# Altium PCB PCB1.PcbDoc
Units mm, origin at the board's own origin, x right, y up, seen from the top; angles counter-clockwise.
Board outline 40.13 x 30.35 mm, 2 copper layers (Top Layer, Bottom Layer); 82 components, 52 nets, 216 pads, 66 vias.
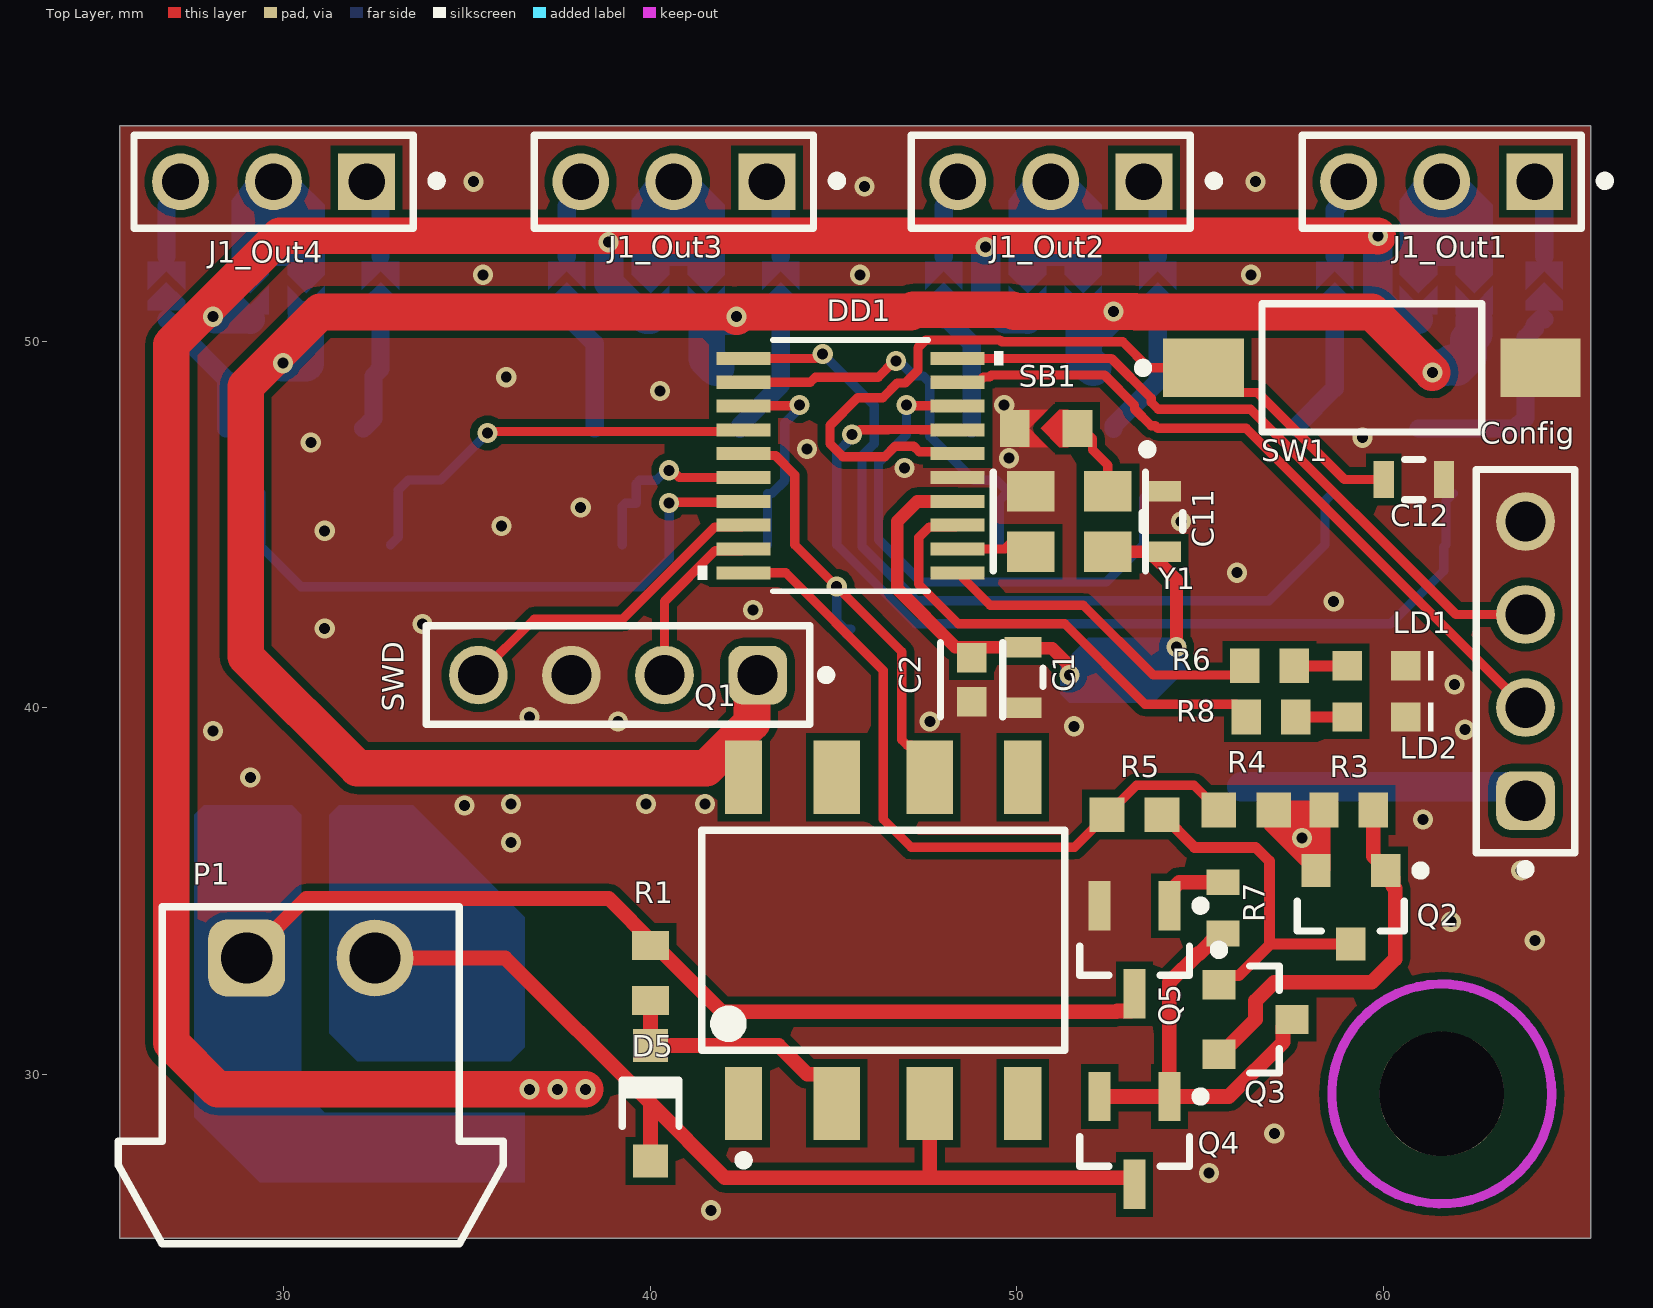
[diagram p0: Top Layer view]
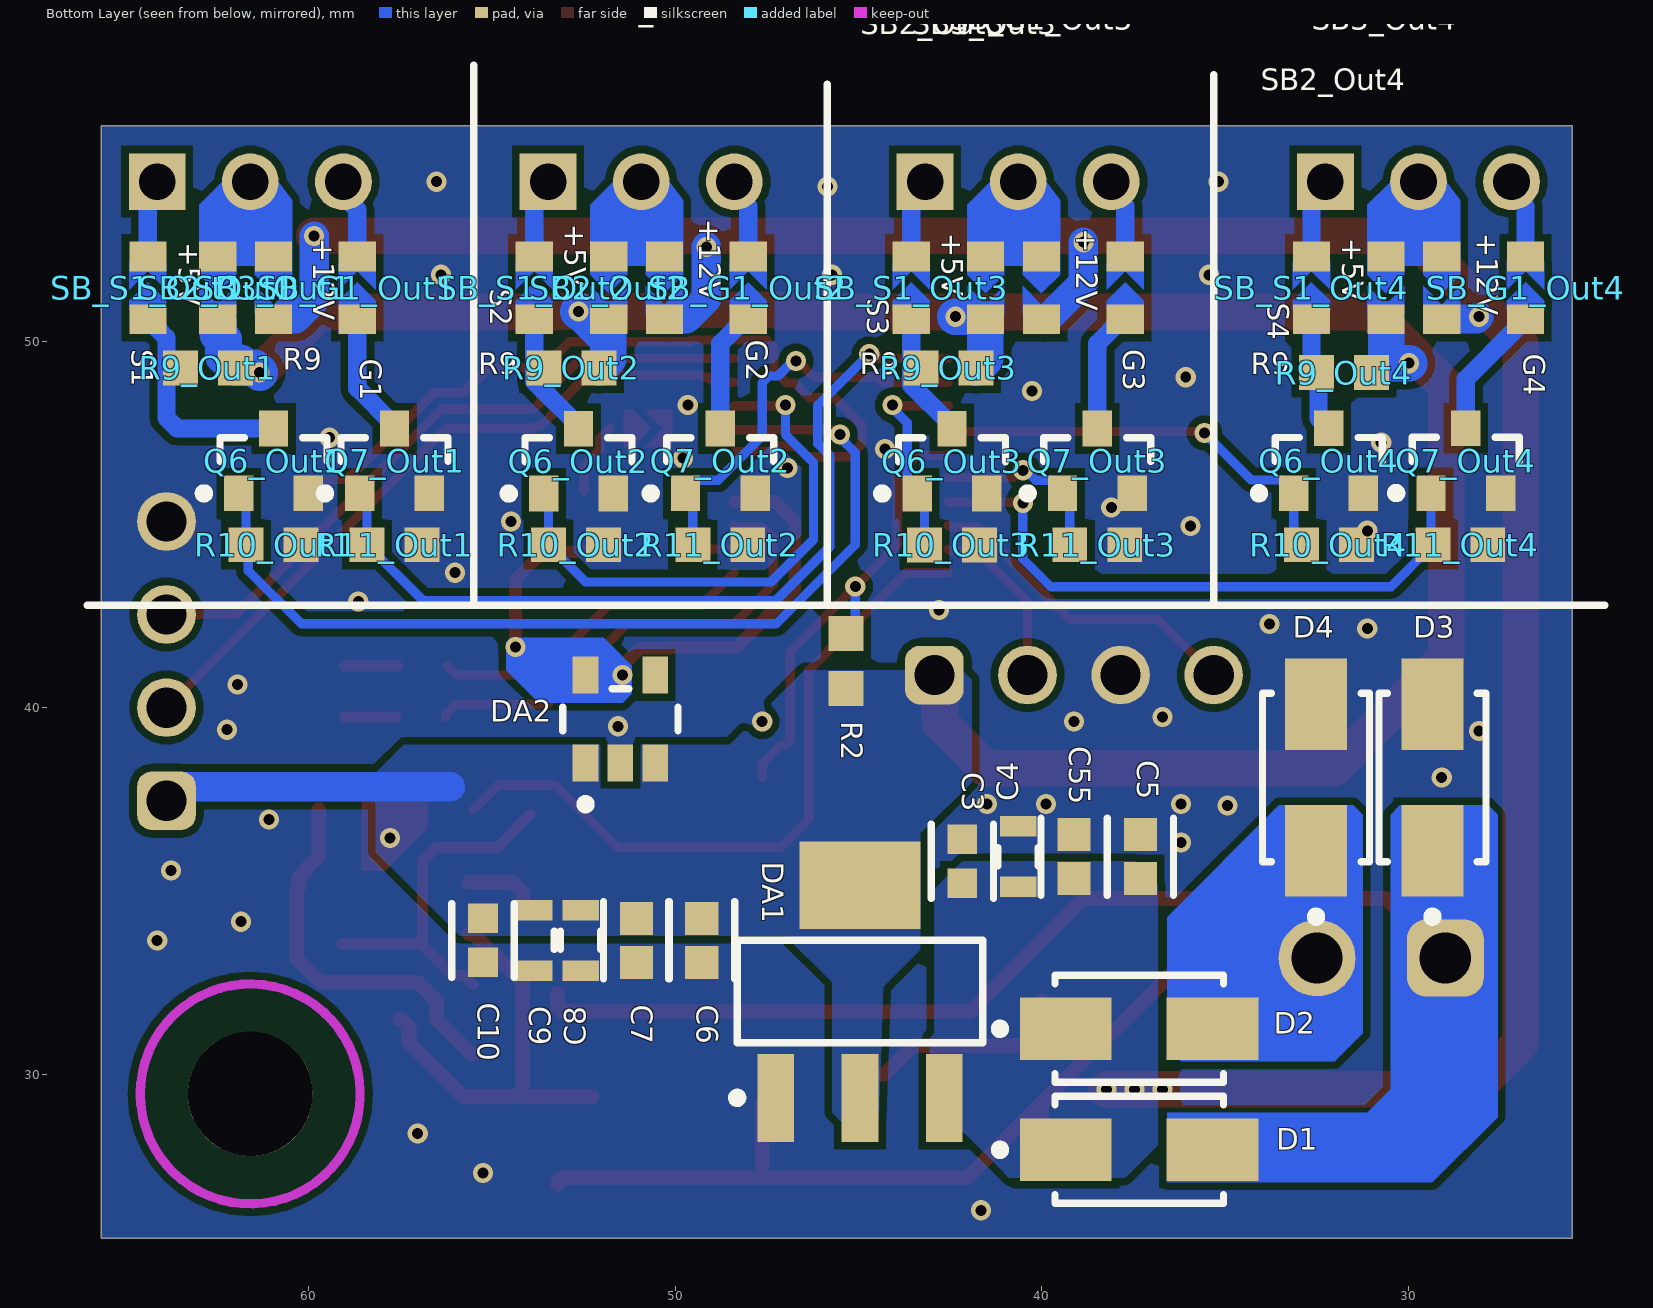
[diagram p1: Bottom Layer view, seen from below]
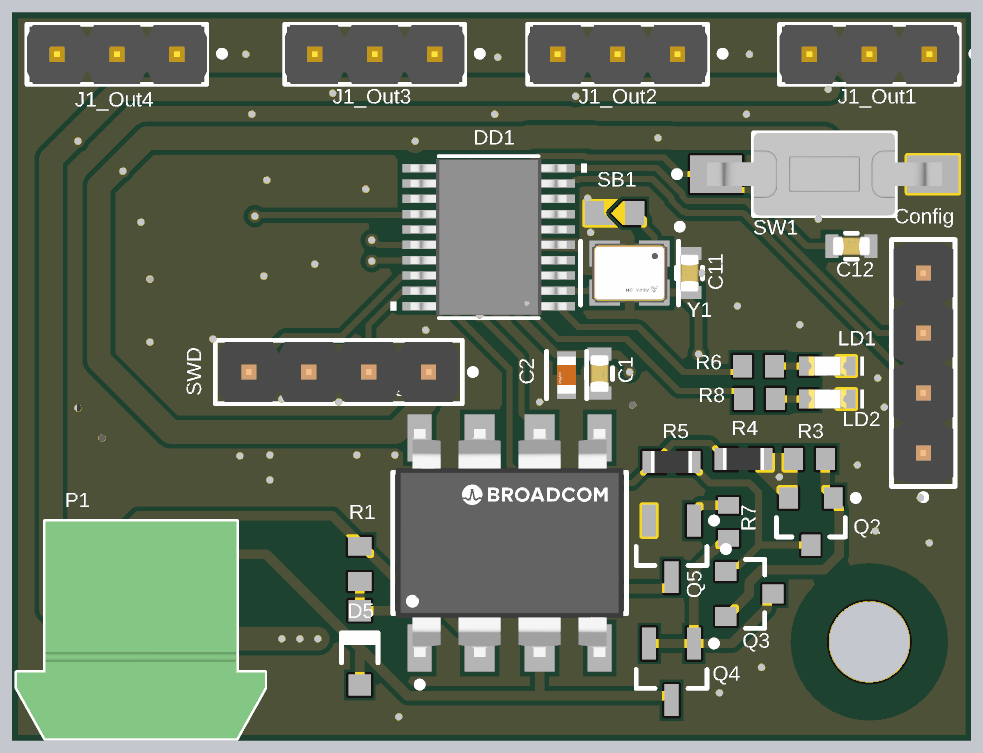
[diagram p2: 3D render of the assembled board from above, using the file's embedded part models]
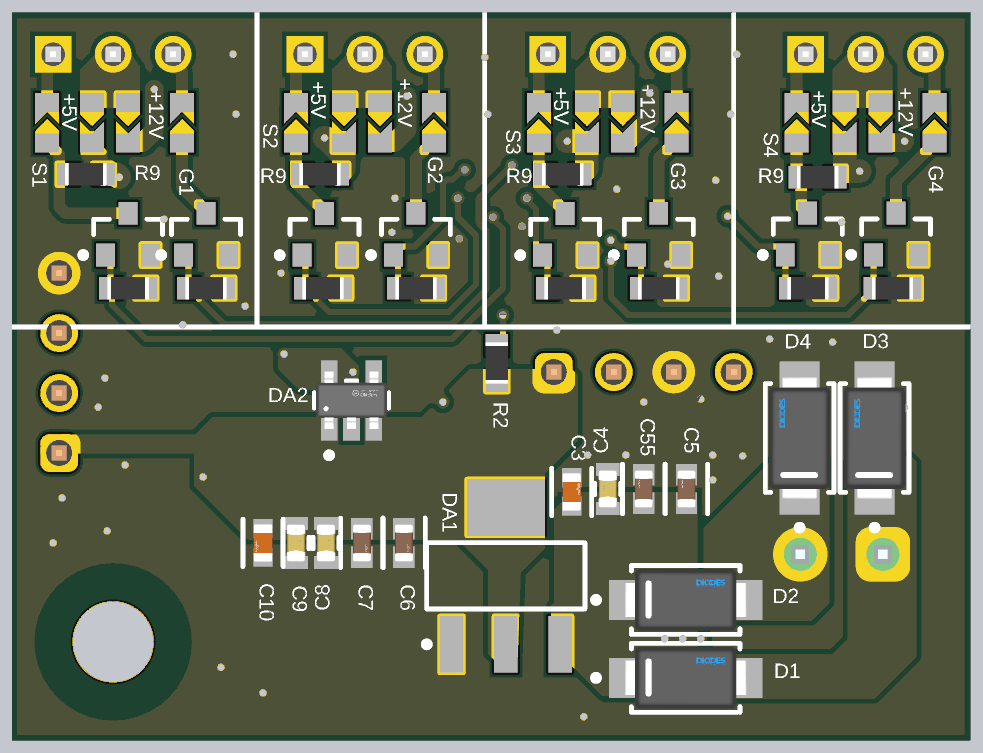
[diagram p3: 3D render of the assembled board from below, using the file's embedded part models]

## Layer stack, top to bottom
Top Solder: solder mask 0.0102, Solder Resist, Dk 3.5
Top Layer: signal copper 0.0356
Dielectric 1: dielectric 0.32, FR-4, Dk 4.8
Bottom Layer: signal copper 0.0356
Bottom Solder: solder mask 0.0102, Solder Resist, Dk 3.5

## Board outline
25.527,25.527 65.659,25.527 65.659,55.88 25.527,55.88

## Design rules (kind name [scope] priority, off if disabled: settings)
Clearance [All] p1: gap=0.2 ignorepadtopadclearanceinfootprint=FALSE
PolygonConnect [All] p1: connectstyle=Direct reliefconductorwidth=0.254 reliefentries=4 polygonreliefangle="90 Angle" airgapwidth=0.254
RoutingVias [All] p1: holewidth=0.3 width=0.7 viastyle="Through Hole" minholewidth=0.3 minwidth=0.5 maxholewidth=3 maxwidth=5
SolderMaskExpansion [All] p1: expansion=0.102 istentingtop=FALSE
SupplyNets "Schematic Supply Nets_3" [InNet('+12V')] p1: voltage=0.000
SupplyNets "Schematic Supply Nets_2" [InNet('+5V')] p2: voltage=0.000
SupplyNets "Schematic Supply Nets_1" [InNet('GND')] p3: voltage=0.000
SupplyNets "Schematic Supply Nets" [InNet('+3V3')] p4: voltage=0.000
Width [All] p1: maxlimit=1 minlimit=0.254 preferedwidth=0.3
30 further rules are at their usual default settings.

## Classes and differential pairs
channel class out: Out1 Out2 Out3 Out4
component class Out4: J1_Out4 Q6_Out4 Q7_Out4 R9_Out4 R10_Out4 R11_Out4 SB2_Out4 SB3_Out4 SB_G1_Out4 SB_S1_Out4
component class Out3: J1_Out3 Q6_Out3 Q7_Out3 R9_Out3 R10_Out3 R11_Out3 SB2_Out3 SB3_Out3 SB_G1_Out3 SB_S1_Out3
component class Out2: J1_Out2 Q6_Out2 Q7_Out2 R9_Out2 R10_Out2 R11_Out2 SB2_Out2 SB3_Out2 SB_G1_Out2 SB_S1_Out2
component class Out1: J1_Out1 Q6_Out1 Q7_Out1 R9_Out1 R10_Out1 R11_Out1 SB2_Out1 SB3_Out1 SB_G1_Out1 SB_S1_Out1
component class top: C1 C2 C3 C4 C5 C6 C7 C8 C9 C10 C11 C12 C55 Config D1 D2 D3 D4 D5 DA1 DA2 DD1 LD1 LD2 P1 Q1 Q2 Q3 Q4 Q5 R1 R2 R3 R4 R5 R6 R7 R8 SB1 SW1 SWD Y1

## Components (designator, comment, footprint, x,y, rotation, side; value= is the part's Value field where it differs from the comment)
C1 "CGA3E2X7R1H104K080AA" FP-CGA3E-0_3-0_1-IPC_C 50.165,40.83 r270 top
C2 "GRM188R60J106ME47D" FP-GRM188-0_1-e0_2_0_55-IPC_C 48.768,40.767 r270 top
C3 "GRM188R60J106ME47D" FP-GRM188-0_1-e0_2_0_55-IPC_C 42.164,35.814 r90 bottom
C4 "CGA3E2X7R1H104K080AA" FP-CGA3E-0_3-0_1-IPC_C 40.64,35.941 r90 bottom
C5 "GRM188R61A226ME15D" FP-GRM188-0_2-IPC_C 37.304,35.942 r90 bottom
C6 "GRM188R61A226ME15D" FP-GRM188-0_2-IPC_C 49.276,33.655 r270 bottom
C7 "GRM188R61A226ME15D" FP-GRM188-0_2-IPC_C 51.054,33.655 r270 bottom
C8 "CGA3E2X7R1H104K080AA" FP-CGA3E-0_3-0_1-IPC_C 52.578,33.655 r270 bottom
C9 "CGA3E2X7R1H104K080AA" FP-CGA3E-0_3-0_1-IPC_C 53.848,33.655 r270 bottom
C10 "GRM188R60J106ME47D" FP-GRM188-0_1-e0_2_0_55-IPC_C 55.245,33.655 r270 bottom
C11 "CGA3E2X7R1H104K080AA" FP-CGA3E-0_3-0_1-IPC_C 53.975,45.085 r90 top
C12 "CGA3E2X7R1H104K080AA" FP-CGA3E-0_3-0_1-IPC_C 60.833,46.228 r0 top
C55 "GRM188R61A226ME15D" FP-GRM188-0_2-IPC_C 39.116,35.941 r90 bottom
Config "61300411121" 61300411121 63.881,41.275 r90 top
D1 "B340A-13-F" FP-SMA-MFG 37.338,27.94 r180 bottom
D2 "B340A-13-F" FP-SMA-MFG 37.338,31.242 r180 bottom
D3 "B340A-13-F" FP-SMA-MFG 29.337,38.1 r90 bottom
D4 "B340A-13-F" FP-SMA-MFG 32.512,38.1 r90 bottom
D5 "1N4148W-7-F" DIOD-SOD123-2_V 40.005,29.21 r90 top
DA1 "LD1117S50CTR" SOT-223_N 44.958,32.258 r90 bottom
DA2 "NCP114ASN330T1G" FP-483-MFG 51.496,39.694 r90 bottom
DD1 "STM32G031F6Px" TSSOP20 45.466,46.609 r180 top value=Value
J1_Out1 "90120-0763" FP-90120-0763-MFG 61.595,54.356 r180 top (schematic designator J1)
J1_Out2 "90120-0763" FP-90120-0763-MFG 50.927,54.356 r180 top (schematic designator J1)
J1_Out3 "90120-0763" FP-90120-0763-MFG 40.64,54.356 r180 top (schematic designator J1)
J1_Out4 "90120-0763" FP-90120-0763-MFG 29.718,54.356 r180 top (schematic designator J1)
LD1 "150060VS75000" WL-SMCW_0603_150060xx75000 59.817,41.148 r180 top
LD2 "150060VS75000" WL-SMCW_0603_150060xx75000 59.817,39.751 r180 top
P1 "15EDGRC-3.5-02" 691305140002 30.734,29.972 r0 top
Q1 "6N137-300E" FP-6N137-300E-MFG 46.355,33.655 r0 top
Q2 "BC857CLT1G" ONSC-SOT-23-3-318-08_V 59.116,34.56 r270 top
Q3 "BC857CLT1G" ONSC-SOT-23-3-318-08_V 56.515,31.496 r0 top
Q4 "BC847B" INF-SOT23_M 53.213,28.194 r270 top
Q5 "BC847B" INF-SOT23_M 53.213,33.401 r270 top
Q6_Out1 "IRLML0030TRPBF" INTR-SOT-23-3_V 60.96,46.736 r180 bottom (schematic designator Q6)
Q6_Out2 "IRLML0030TRPBF" INTR-SOT-23-3_V 52.639,46.732 r180 bottom (schematic designator Q6)
Q6_Out3 "IRLML0030TRPBF" INTR-SOT-23-3_V 42.447,46.732 r180 bottom (schematic designator Q6)
Q6_Out4 "IRLML0030TRPBF" INTR-SOT-23-3_V 32.17,46.742 r180 bottom (schematic designator Q6)
Q7_Out1 "IRLML0030TRPBF" INTR-SOT-23-3_V 57.658,46.736 r180 bottom (schematic designator Q7)
Q7_Out2 "IRLML0030TRPBF" INTR-SOT-23-3_V 48.768,46.736 r180 bottom (schematic designator Q7)
Q7_Out3 "IRLML0030TRPBF" INTR-SOT-23-3_V 38.481,46.736 r180 bottom (schematic designator Q7)
Q7_Out4 "IRLML0030TRPBF" INTR-SOT-23-3_V 28.426,46.746 r180 bottom (schematic designator Q7)
R1 "RC0603FR-071K5L" RESC1608X55X25ML10T15 40.005,32.766 r270 top value=1k5
R2 "ERJ3EKF1002V" RESC1609X55X30NL15T15 45.339,41.275 r90 bottom value=10k
R3 "ERJ-3EKF1502V" RESC1608X55X30NL15T15 59.055,37.211 r180 top value=15
R4 "ERJ3EKF1002V" RESC1609X55X30NL15T15 56.261,37.211 r180 top value=10k
R5 "ERJ3EKF1002V" RESC1609X55X30NL15T15 53.213,37.084 r0 top value=10k
R6 "ERJ-3EKF1003V" RESC1608X55X30NL15T15 56.896,41.148 r0 top value=100
R7 "RC0603FR-076K8L" RESC1608X55X25NL10T15 55.626,34.544 r90 top value=6k8
R8 "ERJ-3EKF1003V" RESC1608X55X30NL15T15 56.936,39.751 r0 top value=100
R9_Out1 "ERJ3EKF1002V" RESC1609X55X30NL15T15 62.75,49.276 r0 bottom value=10k (schematic designator R9)
R9_Out2 "ERJ3EKF1002V" RESC1609X55X30NL15T15 52.832,49.276 r0 bottom value=10k (schematic designator R9)
R9_Out3 "ERJ3EKF1002V" RESC1609X55X30NL15T15 42.545,49.276 r0 bottom value=10k (schematic designator R9)
R9_Out4 "ERJ3EKF1002V" RESC1609X55X30NL15T15 31.75,49.149 r0 bottom value=10k (schematic designator R9)
R10_Out1 "ERJ3EKF1002V" RESC1609X55X30NL15T15 60.96,44.45 r180 bottom value=10k (schematic designator R10)
R10_Out2 "ERJ3EKF1002V" RESC1609X55X30NL15T15 52.705,44.45 r180 bottom value=10k (schematic designator R10)
R10_Out3 "ERJ3EKF1002V" RESC1609X55X30NL15T15 42.447,44.446 r180 bottom value=10k (schematic designator R10)
R10_Out4 "ERJ3EKF1002V" RESC1609X55X30NL15T15 32.159,44.449 r180 bottom value=10k (schematic designator R10)
R11_Out1 "ERJ3EKF1002V" RESC1609X55X30NL15T15 57.658,44.45 r180 bottom value=10k (schematic designator R11)
R11_Out2 "ERJ3EKF1002V" RESC1609X55X30NL15T15 48.768,44.45 r180 bottom value=10k (schematic designator R11)
R11_Out3 "ERJ3EKF1002V" RESC1609X55X30NL15T15 38.481,44.45 r180 bottom value=10k (schematic designator R11)
R11_Out4 "ERJ3EKF1002V" RESC1609X55X30NL15T15 28.575,44.45 r180 bottom value=10k (schematic designator R11)
SB1 "" JP_SMD 50.8,47.625 r0 top
SB2_Out1 "" JP_SMD 62.484,51.46 r90 bottom (schematic designator SB2)
SB2_Out2 "" JP_SMD 51.816,51.46 r90 bottom (schematic designator SB2)
SB2_Out3 "" JP_SMD 41.529,51.46 r90 bottom (schematic designator SB2)
SB2_Out4 "" JP_SMD 30.607,51.46 r90 bottom (schematic designator SB2)
SB3_Out1 "" JP_SMD 60.96,51.46 r90 bottom (schematic designator SB3)
SB3_Out2 "" JP_SMD 50.292,51.46 r90 bottom (schematic designator SB3)
SB3_Out3 "" JP_SMD 40.005,51.46 r90 bottom (schematic designator SB3)
SB3_Out4 "" JP_SMD 29.083,51.46 r90 bottom (schematic designator SB3)
SB_G1_Out1 "" JP_SMD 58.674,51.46 r270 bottom (schematic designator SB_G1)
SB_G1_Out2 "" JP_SMD 48.006,51.46 r270 bottom (schematic designator SB_G1)
SB_G1_Out3 "" JP_SMD 37.719,51.46 r270 bottom (schematic designator SB_G1)
SB_G1_Out4 "" JP_SMD 26.797,51.46 r270 bottom (schematic designator SB_G1)
SB_S1_Out1 "" JP_SMD 64.389,51.46 r270 bottom (schematic designator SB_S1)
SB_S1_Out2 "" JP_SMD 53.848,51.46 r270 bottom (schematic designator SB_S1)
SB_S1_Out3 "" JP_SMD 43.561,51.46 r270 bottom (schematic designator SB_S1)
SB_S1_Out4 "" JP_SMD 32.639,51.46 r270 bottom (schematic designator SB_S1)
SW1 "FSMSMTR" TECO-FSMSMTR_V 59.69,49.276 r0 top
SWD "61300411121" 61300411121 39.116,40.894 r180 top
Y1 "ASE-8.000MHZ-LC-T" FP-ASE-MFG 51.435,45.085 r180 top

## Footprints (in the part's own frame and the unit in brackets; to place one, negate y for a bottom-side part, rotate by r counter-clockwise, add the part's x,y. Pads: shape width x height; smd on the part's side, far side on the other; paste and mask are expansions set on the pad)
61300411121 [mm] "Pin Header, pitch 2.54 mm, THT, Vertical, single row, 4p"
  rrect50% 1.6x1.6 hole 1.1: 1(-3.81,0)
  round 1.6 hole 1.1: 2(-1.27,0) 3(1.27,0) 4(3.81,0)
  silkscreen extent -5.8,-1.35 5.23,1.35, body extent -5.08,-1.27 5.08,1.27, height 8.57
691305140002 [mm] "Horizontal PCB Header with Plastic Latch, pitch 3.5mm, 02p"
  rrect50% 2.1x2.1 hole 1.4: 1(-1.75,3.2)
  round 2.1 hole 1.4: 2(1.75,3.2)
  silkscreen extent -5.25,-4.6 5.25,4.6, body extent -5.25,-4.6 5.25,4.6, height 7.25
DIOD-SOD123-2_V [mm] "SOD123, 2-Leads, Body 2.7x1.55mm, Height 1.45mm"
  rect 0.9x0.95 smd: 1(-1.575,0) 2(1.575,0)
  silkscreen extent -0.64,-0.83 0.64,0.77, body extent -1.35,-0.77 1.35,0.77, height 1.45
FP-6N137-300E-MFG [mm]
  rect 1.016x2 smd paste+0 mask+0: 1(-3.81,-4.45) 4(3.81,-4.45) 5(3.81,4.45) 8(-3.81,4.45)
  rect 1.27x2 smd paste+0 mask+0: 2(-1.27,-4.45) 3(1.27,-4.45) 6(1.27,4.45) 7(-1.27,4.45)
  silkscreen extent -4.95,-6.12 4.95,3, body extent -5.05,-5.55 5.05,5.55, height 0.25
FP-483-MFG [mm]
  rect 1x0.7 smd paste+0 mask+0: 1(-1.2,0.95) 2(-1.2,0) 3(-1.2,-0.95) 4(1.2,-0.95) 5(1.2,0.95)
  silkscreen extent -2.45,-1.58 0.82,1.58, body extent -1.22,-1.5 1.22,1.5, height 1.1
FP-90120-0763-MFG [mm]
  rect 1.55x1.55 hole 1 paste-2539.97 mask+0: 1(-2.54,0)
  round 1.55 hole 1 paste-2539.97 mask+0: 2(0,0) 3(2.54,0)
  silkscreen extent -4.58,-1.27 3.81,1.27, body extent -3.91,-1.37 3.91,1.37, height 0.25
FP-ASE-MFG [mm]
  rect 1.3x1.1 smd paste+0 mask+0: 1(-1.05,-0.825) 2(1.05,-0.825) 3(1.05,0.825) 4(-1.05,0.825)
  silkscreen extent -2.25,-2.09 2.07,1.35, body extent -1.8,-1.48 1.8,1.48, height 0.25
FP-CGA3E-0_3-0_1-IPC_C [mm]
  rect 0.556x1.006 smd paste+0 mask+0: 1(-0.825,0) 2(0.825,0)
  silkscreen extent -0.25,-0.55 0.25,0.55, body extent -1.2,-0.65 1.2,0.65, height 0.25
FP-GRM188-0_1-e0_2_0_55-IPC_C [mm]
  rect 0.808x0.812 smd paste+0 mask+0: 1(-0.602,0) 2(0.602,0)
  silkscreen extent -1.01,-0.85 1.01,0.85, body extent -1.11,-0.55 1.11,0.55, height 0.25
FP-GRM188-0_2-IPC_C [mm]
  rect 0.905x0.906 smd paste+0 mask+0: 1(-0.601,0) 2(0.601,0)
  silkscreen extent -1.05,-0.9 1.05,0.9, body extent -0.8,-0.4 0.8,0.4, height 1
FP-SMA-MFG [mm]
  rect 2.5x1.7 smd paste+0 mask+0: 1(-2,0) 2(2,0)
  silkscreen extent -3.93,-1.46 2.3,1.46, body extent -2.6,-1.3 2.6,1.3, height 2.4
INF-SOT23_M [mm] "SOT23, 3-Leads, Body 2.9x1.3 mm, Pitch 0.95 mm, IPC Low Density"
  rect 1.35x0.6 smd: 1(-1.2,0.95) 2(-1.2,-0.95) 3(1.2,0)
  silkscreen extent -1.32,-1.5 0.7,1.93, body extent -0.7,-1.5 0.7,1.5, height 1.1
INTR-SOT-23-3_V [mm] "SOT23, 3-Leads, Body 2.92x1.3mm, Pitch 1.9mm"
  rect 0.802x0.972 smd: 1(-0.95,-0.885) 2(0.95,-0.885) 3(0,0.885)
  silkscreen extent -2.03,-1.01 1.46,0.64, body extent -1.46,-0.65 1.46,0.65, height 1.12
JP_SMD [mil]
  rect 32x40 smd: 1(33.75,0) 2(-33.75,0)
  Top Layer region: -28.25,0 -18,0 2,20 -28.25,20
  Top Layer region: -28.25,0 -18,0 2,-20 -28.25,-20
  Top Layer region: 24,20 14,20 -6,0 14,-20 24,-20
ONSC-SOT-23-3-318-08_V [mm] "SOT23, 3-Leads, Body 2.92x1.3mm, Pitch 0.95mm"
  rect 0.9x0.8 smd: 1(-1,0.95) 2(-1,-0.95) 3(1,0)
  silkscreen extent -1.12,-1.46 0.65,2.03, body extent -0.65,-1.46 0.65,1.46, height 1.11
RESC1608X55X25ML10T15 [mm] "Chip Resistor, 2-Leads, Body 1.60x0.80mm, IPC Low Density"
  rect 0.8x1 smd: 1(-0.75,0) 2(0.75,0)
  body extent -0.85,-0.45 0.85,0.45, height 0.55
RESC1608X55X25NL10T15 [mm] "Chip Resistor, 2-Leads, Body 1.70x0.90mm, IPC Medium Density"
  rect 0.7x0.9 smd: 1(-0.7,0) 2(0.7,0)
  body extent -0.85,-0.45 0.85,0.45, height 0.55
RESC1608X55X30NL15T15 [mm] "Chip Resistor, 2-Leads, Body 1.60x0.80mm, IPC Medium Density"
  rect 0.8x0.95 smd: 1(-0.675,0) 2(0.675,0)
  body extent -0.87,-0.48 0.87,0.48, height 0.55
RESC1609X55X30NL15T15 [mm] "Chip Resistor, 2-Leads, Body 1.75x0.95mm, IPC Medium Density"
  rect 0.95x0.95 smd: 1(-0.75,0) 2(0.75,0)
  body extent -0.87,-0.48 0.87,0.48, height 0.55
SOT-223_N [mm] "SOT223, 4-Leads, Body 6.5x3.5mm, Pitch 2.3mm, Lead Span 7mm, IPC Medium Density"
  rect 2.4x1 smd: 1(-2.9,2.3) 2(-2.9,0) 3(-2.9,-2.3)
  rect 2.4x3.3 smd: 4(2.9,0)
  silkscreen extent -3.02,-3.35 1.4,3.48, body extent -1.85,-3.35 1.85,3.35, height 1.8
TECO-FSMSMTR_V [mm] "SMD, 2-Leads, Body 6x3.5mm, Pitch 9.19mm"
  rect 2.2x1.6 smd: 1(-4.595,0)
  rect 2.18x1.6 smd: 2(4.595,0)
  silkscreen extent -6.37,-1.75 3,1.75, body extent -4.98,-1.75 4.98,1.75, height 4.4
TSSOP20 [mil] "STM32 package, TSSOP20, 6.4 x 4.4mm"
  rect 58x14 smd paste+0 mask+0: 1(-115,115.16) 2(-115,89.57) 3(-115,63.98) 4(-115,38.39) 5(-115,12.8) 6(-115,-12.8) 7(-115,-38.39) 8(-115,-63.98) 9(-115,-89.57) 10(-115,-115.16) 11(115,-115.16) 12(115,-89.57) 13(115,-63.98) 14(115,-38.39) 15(115,-12.8) 16(115,12.8) 17(115,38.39) 18(115,63.98) 19(115,89.57) 20(115,115.16)
  silkscreen extent -164,-135 164,135, body extent -130,-130 130,130, height 47
WL-SMCW_0603_150060xx75000 [mm] "SMD Mono-color Chip LED, body 1.60 x 0.80 mm"
  rect 0.8x0.8 smd: 1(-0.8,0) 2(0.8,0)
  silkscreen extent -1.55,-0.4 -1.4,0.4, body extent -0.8,-0.4 0.8,0.4, height 0.7

## Part data
C1 C4 C8 C9 C11 C12: library part CMP-2000-07546-2, "Cap Ceramic 100nF 50V X7R 10% Pad SMD 0603 +125°C Automotive T/R", Capacitance=100nF, Case Code (Imperial)=0603, Case Code (Metric)=1608, Dielectric=X7R, Max Operating Temperature=125°C, Min Operating Temperature=-55°C, Package Quantity=1, Ratings=AEC-Q200, Tolerance=10%, Voltage=50V, Case/Package=0603, Composition=Ceramic, Depth=0.8mm, Height=0.8mm, Lead Free="Lead Free", Length=1.6mm, Mount="Surface Mount", Packaging="Tape and Reel", Radiation Hardening=No, REACH SVHC="No SVHC", Termination=SMD/SMT, Thickness=0.035inch, Voltage Rating=50V, Voltage Rating (DC)=50V, Weight=7.1E-05oz, Width=0.8mm
C2 C3 C10: library part CMP-2006-02792-2, "Chip Multilayer Ceramic Capacitors for General Purpose, 0603, 10uF, X5R, 15%, 20%, 6.3V", Capacitance=10uF, Case Code (Imperial)=0603, Case Code (Metric)=1608, Dielectric=X5R, Max Operating Temperature=85°C, Min Operating Temperature=-55°C, Package Quantity=4000, Tolerance=20%, Voltage=6.3V, Case/Package=0603, Depth=0.8mm, Height=0.8mm, Lead Free="Lead Free", Length=1.6mm, Material=Ceramic, Mount="Surface Mount", Packaging="Tape and Reel", Radiation Hardening=No, REACH SVHC="No SVHC", Termination=SMD/SMT, Thickness=0.035inch, Voltage Rating=6.3V, Voltage Rating (DC)=6.3V, Width=0.031inch
C5 C6 C7 C55: library part CMP-2000-06337-3, "Chip Multilayer Ceramic Capacitors for General Purpose, 0603, 22uF, X5R, 15%, 20%, 10V", Capacitance=22uF, Case Code (Imperial)=0603, Case Code (Metric)=1608, Dielectric=X5R, Max Operating Temperature=85°C, Min Operating Temperature=-55°C, Package Quantity=4000, Tolerance=20%, Voltage Rating=10V, Case/Package=0603, Depth=0.8mm, Height=0.8mm, Lead Free="Lead Free", Length=1.6mm, Material=Ceramic, Mount="Surface Mount", Packaging="Tape and Reel", REACH SVHC="No SVHC", Termination=SMD/SMT, Thickness=0.039inch, Voltage Rating (DC)=10V, Weight=0.000222oz, Width=0.8mm
Config SWD: library part CMP-1502-01064-3, Color=Black, Contact Resistance=20mΩ, Current Rating=3A, Max Operating Temperature=105°C, Min Operating Temperature=-40°C, Operating Supply Voltage=250V, Connector Type="Male Pin", Contact Material=Copper, Contact Mating Length=5.9944mm, Contact Plating=Gold, Gender=Male, Height=8.89mm, Lead Free="Lead Free", Lead Pitch=2.54mm, Mount="Through Hole", NexarPartId=32855522, Number of Contacts=4, Number of Pins=4, Number of Positions=4, Number of Rows=1, Orientation=Vertical, Packaging=Bulk, Pitch=2.54mm, REACH SVHC=Unknown, RoHS=Compliant, Termination=Solder, Voltage Rating=250V
D1 D2 D3 D4: library part CMP-1667-00003-3, "DIODE SCHOTTKY 40V 3A SMA", Average Rectified Current=3A, Capacitance=250pF, Case/Package=SMA, Forward Voltage=500mV, Max Forward Surge Current (Ifsm)=80A, Max Operating Temperature=125°C, Max Repetitive Reverse Voltage (Vrrm)=40V, Max Reverse Current=500uA, Min Operating Temperature=-55°C, Package Quantity=5000, Contact Plating=Tin, Current=3A, Current Rating=3A, Element Configuration=Single, Forward Current=3A, Height=2.3mm, Lead Free="Lead Free", Length=4.6mm, Max Reverse Voltage (DC)=40V, Mount="Surface Mount", Number of Pins=2, Output Current=3A, Packaging="Tape and Reel", Peak Non-Repetitive Surge Current=80A, Polarity=Standard, Radiation Hardening=No, REACH SVHC="No SVHC", RoHS Compliant=Yes, Series=-, Termination=SMD/SMT, Voltage=40V, Voltage Rating (DC)=40V, Weight=0.002258oz, Width=2.92mm
D5: library part CMP-2000-04932-2, "Fast Switching Diode, 100 V, 0.15 A, -65 to 150 degC, 2-Pin?SOD123, RoHS, Tape and Reel", If - Forward Current=0.15A, Ir - Reverse Current=1uA, Manufacturer=DiodesIncorporated, Max Surge Current=2A, Maximum Operating Temperature=+150C, Minimum Operating Temperature=-65C, Operating Temperature Range=-65Cto+150C, Package / Case=SOD-123, Package Reference=SOD123-2, Peak Reverse Voltage=100V, Vf - Forward Voltage=1.25V, Brand=DiodesIncorporated, Configuration=Single, Datasheet URL=http://www.farnell.com/datasheets/1915529.pdf, Datasheet Version="Rev. 24-2, 10/2013", Factory Pack Quantity=3000, Height=1.25mm, Length=2.85mm, Manufacturer URL=http://www.diodes.com/, Mounting Style=SMD/SMT, Package URL=http://www.diodes.com/datasheets/ds18004.pdf, Packaging=Reel, Product=SwitchingDiodes, Product Category=Diodes-GeneralPurpose,Power,Switching, Recovery Time=4ns, RoHS=True, Series=1N4148, Type=SwitchingDiode, Unit Weight=0.000353oz, Width=1.7mm
DA1: library part CMP-0244-00311-1, "Fixed Low Drop Positive Voltage Regulator, 5V, 4-Pin SOT-223, Tape and Reel", ComponentLink1Description="Manufacturer URL", ComponentLink1URL=http://www.st.com, ComponentLink2Description=Datasheet, ComponentLink2URL=http://www.st.com/internet/com/TECHNICAL_RESOURCES/TECHNICAL_LITERATURE/DATASHEET/CD00000544.pdf, DatasheetVersion=1/11/2011, PackageDescription="4-Pin SOT-223 Package, 6.5 x 3.5 mm Body, 2.3 mm Pitch, 7 mm Lead Span", PackageReference=SOT-223, PackageVersion=2010
DA2: library part CMP-07128-000001-1, "IC REG LINEAR 3.3V 300MA 5TSOP", Dropout Voltage=150mV, Manufacturer="ON Semiconductor", Max Junction Temp=+150°C, Max Supply Voltage=5.5V, Min Supply Voltage=1.7V, Nominal Supply Current=50uA, Output Current=300mA, Output Voltage=3.3V, Package=483, Temperature="to +150°C", Accuracy Percentage=1%, Automotive=No, Category=IC, ComponentLink2Description=Datasheet, ComponentLink2URL=https://www.onsemi.com/pub/Collateral/NCP114-D.PDF, Device Class L1="Integrated Circuits (ICs)", Device Class L2="Power Management ICs", Device Class L3="Voltage Regulators - Linear", Digikey Description="IC REG LINEAR 3.3V 300MA 5TSOP", Footprint Url=https://www.onsemi.com/pub/Collateral/483.PDF, Height=1.1mm, Lead Free=Yes, Manufacturer Part Number=NCP114ASN330T1G, Number of Outputs=1, Octopart=https://octopart.com/ncp114asn330t1g-on+semiconductor-74628742, Output Type=Fixed, RoHS=TRUE, Standoff Height=0.01mm, Temperature Range High=+150°C
DD1: "The STM32G031x4/x6/x8 mainstream microcontrollers are based on high-performance Arm® Cortex®-M0+ 32-bit RISC core operating at up to 64 MHz frequency.   / 32 Kbytes of Flash program memory and 8 Kbytes of SRAM. With 20pin TSSOP 6.4x4.4 package", Manufacturer_Part_Number=stm32g0_tssop20_t1, Copyright="Copyright (C) 2018 Accelerated Designs. All rights reserved", RefDes=RefDes, Type=DEV, Vendor=STMicroelectronics
J1_Out1 J1_Out2 J1_Out3 J1_Out4: library part CMP-04776-000084-1, "CONN HEADER VERT 3POS 2.54MM", Current Rating=3A, Manufacturer=Molex, Temperature="-55°C to +125°C", Temperature Range High=+125°C, Temperature Range Low=-55°C, Voltage Rating=350V, Automotive=No, Category=Conn, ComponentLink2Description=Datasheet, ComponentLink2URL=https://www.molex.com/webdocs/datasheets/pdf/en-us/0901200763_PCB_HEADERS.pdf, Conn Gender=Male, Conn Orientation=Vertical, Contact Material=Gold,Nickel, Device Class L1=Connectors, Device Class L2="Headers and Wire Housings", Device Class L3=unset, Digikey Description="CONN HEADER VERT 3POS 2.54MM", Footprint Url=https://www.molex.com/pdm_docs/sd/901200763_sd.pdf, Height=5.8mm, Lead Free=Yes, Manufacturer Part Number=90120-0763, Mouser Description="Board-To-Board Connector, C-Grid III 90120 Series, Through Hole, Header, 3, 2.54 mm", Number of Contacts=3, Number of Rows=1, Octopart=https://octopart.com/90120-0763-molex-655433, Package=90120-0763, Pitch=2.54mm, RoHS=TRUE
LD1 LD2: library part CMP-1426-00006-7, "WURTH ELEKTRONIK - 150060VS75000 - LED, Green, SMD, 0603, 30 mA, 2 V, 570 nm", Case Code (Imperial)=0603, Case Code (Metric)=1608, Color=Green, Forward Current=100mA, Forward Voltage=2V, Max Junction Temperature (Tj)=95°C, Max Operating Temperature=85°C, Max Reverse Voltage (DC)=5V, Min Operating Temperature=-40°C, Power Dissipation=72mW, Test Current=20mA, Case/Package=0603, Dominant Wavelength=570nm, Height=700µm, Length=1.6mm, Lens Style="Clear, Rectangular", Luminous Intensity=40mcd, Mount="Surface Mount", Number of Pins=2, Packaging="Tape and Reel", Peak Wavelength=572nm, REACH SVHC=Unknown, Reverse Voltage=5V, RoHS=Compliant, Viewing Angle=140°, Wavelength=570nm, Width=800µm
P1: library part CMP-1502-01775-2, Gender=Male, Lead Pitch=3.5mm, NexarPartId=78871375, Number of Pins=2, Packaging=Box, RoHS=Non-Compliant
Q1: library part CMP-18400-000015-1, "OPTOISO 3.75KV OPN COLL 8DIP GW", Ambient Temperature Range High=+85°C, Ambient Temperature Range Low=-40°C, Forward Current=10mA, Forward Voltage=1.5V, Isolation Voltage=3750Vrms, Manufacturer=Broadcom, Max Supply Voltage=5.5V, Min Supply Voltage=4.5V, Package=0, Reverse Voltage=5V, Temperature="-40°C to +85°C", Automotive=No, Category=Trans, ComponentLink2Description=Datasheet, ComponentLink2URL=https://docs.broadcom.com/docs/AV02-0940EN, Device Class L1=Optoelectronics, Device Class L2=Optocouplers, Device Class L3=unset, Digikey Description="OPTOISO 3.75KV OPN COLL 8DIP GW", Height=4.455mm, Lead Free=Yes, Manufacturer Part Number=6N137-300E, Mouser Description="High Speed Optocouplers 10 Mb/s 3750Vrms", Octopart=https://octopart.com/6n137-300e-broadcom-71125550, RoHS=TRUE, Standoff Height=0.505mm, Temperature Range High=+85°C, Temperature Range Low=-40°C, Turn Off Delay Time=50ns, Turn On Delay Time=48ns
Q2 Q3: library part CMP-1048-00802-1, "General Purpose Transistor, PNP Silicon, 3-Pin SOT-23, Pb-Free, Tape and Reel", Manufacturer="On Semiconductor", ComponentLink1Description="Manufacturer URL", ComponentLink1URL=http://www.onsemi.com/, ComponentLink2Description=Datasheet, ComponentLink2URL=http://www.onsemi.cn/pub_link/Collateral/BC856ALT1-D.PDF, ComponentLink3Description="Package Specification", ComponentLink3URL=http://www.onsemi.cn/pub_link/Collateral/318-08.PDF, DatasheetVersion="Rev. 13", fT Min (MHz)=100, IC Continuous (A)=-0.1, Mounting Technology="Surface Mount", PackageDescription="3-Pin Small Outline Transistor, Body 2.92 x 1.3 mm, Pitch 0.95 mm", PackageReference=SOT-23-3-318-08, PackageVersion="Rev. AP, 11/2009", Packing="Tape and Reel", PartNumber=BC857CLT1G, Polarity=PNP, RoHS=TRUE
Q4 Q5: library part CMP-1177-00042-1, "NPN Silicon AF Transistor, 45 V VCEO, 100 mA IC, SOT23, Reel, Green", Manufacturer=Infineon, ComponentLink1Description="Manufacturer URL", ComponentLink1URL=http://www.infineon.com/, ComponentLink2Description=Datasheet, ComponentLink2URL=http://www.infineon.com/dgdl/bc847series_bc848series_bc849series_bc850series.pdf?folderId=db3a304314dca389011541d30fa21656&fileId=db3a304314dca389011541d4630a1657, ComponentLink3Description="Package Specification", ComponentLink3URL=http://www.infineon.com/dgdl/SOT23-Package_Overview.pdf?folderId=db3a30431936bc4b0119532290053c66&fileId=db3a30431936bc4b0119533468123c85, fT (typ)="250Â MHz", Green=TRUE, IBM (max)="200Â mA", IC (max)="100Â mA", ICBO (max)="15Â nA", ICM (max)="200Â mA", Mounting Technology="Surface Mount", PackageDescription="3-Pin Small Outline Transistor Package, 1.3 x 2.9 mm Body, 0.95 mm Pitch", PackageReference=SOT23, PackageVersion=Apr-08, Packing=Reel, PartNumber=BC847B, Polarity=NPN, Ptot (max)="330Â mW", VCBO (max)="50Â V", VCEO (max)="45Â V", VEBO (max)="6Â V"
Q6_Out1 Q6_Out2 Q6_Out3 Q6_Out4 Q7_Out1 Q7_Out2 Q7_Out3 Q7_Out4: library part CMP-2000-06483-1, "HEXFET(R) Power MOSFET, 1.3 W, 4.4 ns, -55 to 150 degC, 3-Pin SOT-23, RoHS, Tape and Reel", Manufacturer="International Rectifier", Maximum Continuous Drain Current=5.3A, Maximum Drain Source Resistance=0.027Ω, Maximum Drain Source Voltage=30V, Maximum Gate Source Voltage=±20V, Maximum Gate Threshold Voltage=2.3V, Maximum Operating Temperature=+150°C, Maximum Power Dissipation=1.3W, Minimum Gate Threshold Voltage=1.3V, Minimum Operating Temperature=-55°C, Package Description="3-Pin Small Outline Transistor, Body 2.92 x 1.3 mm, Pitch 0.95 mm", Package Reference=SOT-23-3, Package Type=SOT-23, Typical Input Capacitance @ Vds=382pF@15V, Category=PowerMOSFET, Channel Mode=Enhancement, Channel Type=N, Datasheet URL=https://datasheet.ciiva.com/4442/irlml0030pbf-90019-4442451.pdf, Datasheet Version=02/2012, Dimensions=3.04x1.4x1.02mm, Height=1.02mm, Length=3.04mm, Manufacturer URL=http://internationalrectifier.com/, Mounting Technology=SurfaceMount, Mounting Type=SurfaceMount, Number of Elements per Chip=1, Pin Count=3, Transistor Configuration=Single, Transistor Material=Si, Typical Gate Charge @ Vgs=2.6nC@4.5V, Typical Turn-Off Delay Time=7.4ns, Typical Turn-On Delay Time=5.2ns, Width=1.4mm
R1: library part CMP-2100-03665-1, "Chip Resistor, 1.5 KOhm, +/- 1%, 0.1 W, -55 to 155 degC, 0603 (1608 Metric), RoHS, Tape and Reel", Case Code (Imperial)=0603, Case Code (Metric)=1608, Manufacturer=Yageo, Max Operating Temperature=155degC, Max Power Dissipation=100mW, Min Operating Temperature=-55degC, Package Description="2-Pin Surface Mount Device, Body 1.6 x 0.8 mm", Package Quantity=1, Resistance=1.5KOhm, Temperature Coefficient=100ppm/degreesC, Tolerance=1%, Voltage Rating=50V, Case/Package=0603, Composition=ThickFilm, Datasheet URL=http://www.yageo.com/NewPortal/yageodocoutput?fileName=/pdf/R-Chip/PYu-RC_Group_51_RoHS_L_5.pdf, Datasheet Version="Rev. 5, 10/2016", Depth=0.8mm, Height=0.022inch, Lead Free=LeadFree, Length=0.063inch, Manufacturer URL=http://www.yageo.com/, Military Standard=Not, Number of Pins=2, Number of Terminations=2, Package Reference=0603, Packaging=TapeandReel, Power Rating=100mW, REACH SVHC=NoSVHC, RoHSCompliant=true, Termination=SMD/SMT, Voltage Rating (DC)=50V, Width=0.031inch
R2 R4 R5 R9_Out1 R9_Out2 R9_Out3 R9_Out4 R10_Out1 R10_Out2 R10_Out3 R10_Out4 R11_Out1 R11_Out2 R11_Out3 R11_Out4: library part CMP-1012-00623-3, "Chip Resistor, 10 KOhm, +/- 1%, 0.1 W, -55 to 155 degC, 0603 (1608 Metric), RoHS, Tape and Reel", Case Code (Imperial)=0603, Case Code (Metric)=1608, Manufacturer=Panasonic, Max Operating Temperature=155degC, Max Power Dissipation=100mW, Min Operating Temperature=-55degC, Package Description="2-Pin Surface Mount Device, Body 1.6 x 0.85 mm", Package Quantity=1, Package Reference=603, Resistance=10KOhm, Temperature Coefficient=100ppm\/degreesC, Tolerance=1%, Voltage Rating=75V, Case\/Package=0603, Composition=ThickFilm, Contact Plating=Tin, Datasheet URL=https://industrial.panasonic.com/cdbs/www-data/pdf/RDA0000/AOA0000C304.pdf, Datasheet Version=02/2017, Depth=0.8mm, Height=0.45mm, Lead Free=LeadFree, Length=1.6mm, Manufacturer URL=http://www.panasonic.com/, Military Standard=Not, Mount=SurfaceMount, Mounting Technology=SurfaceMount, Number of Pins=2, Number of Terminations=2, Packaging=TapeandReel, Power Rating=100mW, Radiation Hardening=No, REACH SVHC=NoSVHC, RoHSCompliant=true, Termination=SMD/SMT, Voltage Rating (DC)=75V, Width=0.031inch
R3: library part CMP-2000-00258-1, Manufacturer=Panasonic, Part Number=ERJ-3EKF1502V
R6 R8: library part CMP-2000-00182-1, Manufacturer=Panasonic, Part Number=ERJ-3EKF1003V
R7: library part CMP-1659-00046-1, "Chip Resistor, 6.8 KOhm, +/- 1%, 100 mW, -55 to 155 degC, 0603 (1608 Metric), RoHS, Tape and Reel", Case\Package=Metal, Colour=Black, Current Rating="2 A", Max Operating Temperature="85 degC", Min Operating Temperature="-25 degC", Package Quantity=1, Voltage Rating="34 V", ComponentLink1Description="Manufacturer URL", ComponentLink1URL=http://www.yageo.com/, ComponentLink2Description=Datasheet, ComponentLink2URL=http://www.yageo.com/documents/recent/PYu-RC_Group_51_RoHS_L_04.pdf, Contact Material=Copper, Contact Plating=Silver, DatasheetVersion="Rev. 4, 02/2016", Gender=Female, Height="13 mm", Length="19.5 mm", Mount="Through Hole", PackageDescription="2-Pin Surface Mount Device, Body 1.6 x 0.8 mm", PackageReference=0603, Pins=1, REACH SVHC=Unknown, RoHSCompliant=true, Shielding=Unshielded, Width="10 mm"
SB1 SB2_Out1 SB2_Out2 SB2_Out3 SB2_Out4 SB3_Out1 SB3_Out2 SB3_Out3 SB3_Out4 SB_G1_Out1 SB_G1_Out2 SB_G1_Out3 SB_G1_Out4 SB_S1_Out1 SB_S1_Out2 SB_S1_Out3 SB_S1_Out4: library part "Circuit Breaker", "Circuit Breaker", Published=24-Mar-1999, Publisher="Altium Limited", Revision="July-2002: Re-released for DXP Platform.", Solder=NO
SW1: library part CMP-2000-07501-1, "FSMSM Push Button Switch, 50 mA, -35 to 85 degC, 2-Pin SMD, RoHS, Tape and Reel", Case\/Package=SMD/SMT, Contact Current Rating=50mA, Contact Resistance=100mOhm, Manufacturer="TE Connectivity", Max Operating Temperature=85degC, Max Voltage Rating (DC)=12V, Min Operating Temperature=-35degC, Operating Force=180gf, Package Description="2-Pin Surface Mount Device, Body 6 x 3.5 mm, Pitch 9.19 mm", Package Quantity=1800, Voltage Rating (DC)=24V, Actuator Length=1.07mm, Actuator Material=Polyamide, Contact Material=Brass, Contact Plating=Silver, Current Rating=50mA, Datasheet URL=http://www.te.com/commerce/DocumentDelivery/DDEController?Action=showdoc&DocId=Customer+Drawing%7F1437566-3%7FC2%7Fpdf%7FEnglish%7FENG_CD_1437566-3_C2_1437566_3_1_c.dwg.pdf%7F1437566-4, Datasheet Version="Rev. C2, 08/2014", Electrical Life=20000Cycles, ELV=Compliant, Illumination Type=Illuminated, Lead Free=LeadFree, Manufacturer URL=http://www.te.com/, Mechanical Life=20000Cycles, Mount=SurfaceMount, Mounting Technology=SurfaceMount, Orientation=Straight, Package Reference=FSMSMTR, Packaging=TapeandReel, REACH SVHC=Unknown, RoHSCompliant=true, Switch Travel=0.25mm, Termination=GullWing, Throw Configuration=SPST
Y1: library part CMP-27762-006944-1, "XTAL Oscillator 8MHz ±50ppm CMOS 3.3V 4-SMD 3.2mm x 2.5mm", Case/Package=SMD/SMT, Frequency=8MHz, Frequency Stability=50ppm, Load Capacitance=15pF, Max Operating Temperature=85°C, Max Supply Current=7mA, Max Supply Voltage=3.465V, Min Operating Temperature=-40°C, Min Supply Voltage=3.135V, Operating Frequency="8 MHz", Operating Supply Voltage=3.3V, Package Quantity=1000, Depth=2.5mm, Height=0.047inch, Lead Free="Lead Free", Length=3.2mm, Mount="Surface Mount", Number of Pins=4, Packaging="Tape and Reel", Radiation Hardening=No, REACH SVHC="No SVHC", Series=ASE, Termination=SMD/SMT, Width=0.098inch

## Free pads (board coordinates)
  round 3.4 hole 3.4: 1(61.595,29.464)

## Via types
v1: diameter 0.55, hole 0.3, Top Layer to Bottom Layer, tented both sides, 66 vias

## Nets (pads, with @x,y where several pads share a name; then routed paths per layer and width w, separated by ;. In a path a pad name is that pad's centre, name@x,y a point inside that pad or via, vN(x,y) a via of type N, cw(c..) or ccw(c..) an arc to the next point about the centre after c; other vN are vias at no path point)
+3V3: C1.1 C2.1 C11.1 DA2.5 DD1.4 Y1.4 | length 13.7
  Top Layer w0.35: DD1.4 47.285,45.634 46.736,45.085 46.736,43.248 48.329,41.655 C1.1 50.195,41.625 50.958,41.625 51.397,41.186 51.397,40.932 v1(51.435,40.894) ; Y1.4 C11.1@53.848,44.26 ; C11.1@53.756,44.202 53.756,44.102 54.356,43.502 v1(54.356,41.656)
+5V: C6.1 C7.1 C8.1 C9.1 C10.1 Config.1 DA1.2 DA1.4 DA2.1 DA2.3 Q1.8 Q2.2 R2.1 R3.2 R4.1 R9_Out1.1 R9_Out2.1 R9_Out3.1 R9_Out4.1 SB2_Out1.2 SB2_Out2.2 SB2_Out3.2 SB2_Out4.2 SWD.1 | length 74.5
  Top Layer w1: v1(42.353,50.673) 42.226,50.8 30.988,50.8 28.956,48.768 28.956,41.402 32.004,38.354 41.529,38.354 42.775,39.6 42.775,40.743 SWD.1 ; v1@42.376,50.8 47.107,50.8 47.172,50.866 49.881,50.866 49.932,50.815 53.232,50.815 53.247,50.8 59.69,50.8 v1(61.341,49.149)
  Bottom Layer w0.8: 56.134,37.846 63.5,37.846 Config.1
  Bottom Layer w1: v1(29.972,49.403) 30.599,49.403 30.599,50.595 SB2_Out4.2 ; SB2_Out3.2 41.537,50.595 41.537,49.534 R9_Out3.1 ; 42.037,50.673 v1(42.353,50.673) ; SB2_Out2.2 51.824,50.595 51.824,50.038 ; R9_Out2.1 51.824,49.534 51.824,50.038 ; v1(52.64,50.815) 52.601,50.815 51.824,50.038 ; v1(61.341,49.149) 61.468,49.276 61.722,49.276 R9_Out1.1@61.861,49.415 ; R9_Out1.1 62.325,49.601 62.325,50.041 62.476,50.192 62.476,50.595 SB2_Out1.2
  other v1: 57.785,36.449
+12V: C3.1 C4.1 C5.1 C55.1 D1.1 D2.1 DA1.3 SB3_Out1.2 SB3_Out2.2 SB3_Out3.2 SB3_Out4.2 | length 74.6
  Top Layer w1: v1(38.227,29.591) v1(37.465,29.591) v1(36.703,29.591) 28.194,29.591 26.924,30.861 26.924,49.911 27.877,50.863 29.894,52.881 38.862,52.881 59.842,52.881 v1(59.852,52.871)
  Bottom Layer w0.8: v1(28.067,50.673) 28.13,50.61 29.077,50.61 SB3_Out4.2 ; v1(38.862,52.705) 38.862,51.602 39.855,50.61 39.897,50.61 39.903,50.603 SB3_Out3.2 ; v1(49.149,52.578) 49.149,51.153 49.692,50.61 50.286,50.61 SB3_Out2.2 ; v1(59.852,52.871) 59.852,51.118 60.36,50.61 60.954,50.61 SB3_Out1.2
Cnf_RX: Config.3 DD1.10 | length 18.5
  Top Layer w0.254: DD1.10 52.581,49.534 53.668,48.447 53.668,48.341 53.86,48.149 56.379,48.149 61.983,42.545 Config.3
Cnf_TX: Config.2 DD1.9 | length 19.4
  Top Layer w0.254: DD1.9 48.946,48.884 49.091,49.029 49.259,49.029 49.31,49.08 52.393,49.08 53.214,48.259 53.214,48.153 53.672,47.695 53.778,47.695 53.848,47.625 56.261,47.625 Config.2
DCC1: D1.2 D3.1 P1.1 Q5.3 R1.1 | length 26.6
  Top Layer w0.4: P1.1 30.61,34.798 38.862,34.798 40.124,33.536 41.95,31.71 52.722,31.71 52.738,31.726 53.113,31.726 53.213,31.826 Q5.3
DCC2: D2.2 D4.1 D5.1 P1.2 Q1.3 Q4.3 | length 26.9
  Top Layer w0.4: P1.2 36.043,33.172 40.005,29.21 ; D5.1 40.005,29.21 ; Q1.3 47.625,27.178 ; Q4.3 53.213,27.078 53.113,27.178 47.625,27.178 ; 40.005,29.21 42.037,27.178 47.625,27.178
DCC_data: DD1.15 Q1.6 R2.2 | length 13.1
  Top Layer w0.254: DD1.15 42.596,46.883 43.414,46.883 43.942,46.355 43.942,44.45 v1(45.085,43.307) 46.863,41.529 46.863,39.127 47.012,38.978 47.117,38.978 47.625,38.47 Q1.6
  Bottom Layer w0.254: v1(45.085,43.307) 45.085,42.373 45.306,42.152 45.466,42.152 R2.2
G1: DD1.11 Q7_Out1.1 R11_Out1.1 | length 23.5
  Top Layer w0.254: DD1.11 44.501,49.534 44.624,49.657 v1(44.704,49.657)
  Bottom Layer w0.254: v1(44.704,49.657) 46.106,48.255 46.106,47.207 45.774,46.875 45.774,44.403 47.251,42.926 56.884,42.926 R11_Out1.1 58.408,45.651 Q7_Out1.1
G2: DD1.12 Q7_Out2.1 R11_Out2.1 | length 11.3
  Top Layer w0.254: DD1.12 44.366,48.884 44.504,49.022 46.217,49.022 46.658,49.463 v1(46.704,49.463)
  Bottom Layer w0.254: v1(46.704,49.463) 46.784,49.463 47.194,49.053 47.445,49.053 47.625,48.873 47.625,47.415 48.83,46.21 49.444,46.21 49.718,45.936 Q7_Out2.1 49.518,45.651 R11_Out2.1
G3: DD1.16 Q7_Out3.1 R11_Out3.1 | length 5.2
  Top Layer w0.254: v1(40.513,46.482) 40.593,46.482 40.791,46.284 DD1.16
  Bottom Layer w0.254: R11_Out3.1 39.231,45.492 39.32,45.581 39.612,45.581 39.612,46.117 39.705,46.21 40.161,46.21 40.433,46.482 v1(40.513,46.482)
G4: DD1.17 Q7_Out4.1 R11_Out4.1 | length 17
  Top Layer w0.254: v1(40.513,45.593) 40.534,45.614 42.524,45.614 DD1.17
  Bottom Layer w0.254: Q7_Out4.1 29.376,44.501 R11_Out4.1 30.468,43.307 39.751,43.307 40.513,44.069 v1(40.513,45.593)
GND: C1.2 C2.2 C3.2 C4.2 C5.2 C6.2 C7.2 C8.2 C9.2 C10.2 C11.2 C12.2 C55.2 Config.4 D3.2 D4.2 DA1.1 DA2.2 DD1.5 LD1.1 LD2.1 Q5.2 Q6_Out1.2 Q6_Out2.2 Q6_Out3.2 Q6_Out4.2 Q7_Out1.2 Q7_Out2.2 Q7_Out3.2 Q7_Out4.2 R10_Out1.2 R10_Out2.2 R10_Out3.2 R10_Out4.2 R11_Out1.2 R11_Out2.2 R11_Out3.2 R11_Out4.2 SB1.2 SW1.2 SWD.3 Y1.2
  other v1: 41.656,26.289 55.245,27.305 57.025,28.385 64.135,33.655 61.849,34.163 63.754,35.56 36.195,36.322 61.087,36.957 34.925,37.338 36.195,37.379 39.878,37.379 41.492,37.379 29.083,38.1 28.067,39.37 62.23,39.403 51.562,39.497 39.116,39.624 47.625,39.624 36.703,39.751 61.946,40.64 31.115,42.164 33.782,42.291 42.799,42.672 58.648,42.9 56.007,43.688 31.115,44.831 35.941,44.958 54.483,45.085 38.1,45.466 46.932,46.54 49.784,46.812 44.273,47.067 30.734,47.244 59.436,47.371 49.657,48.26 40.259,48.641 36.068,49.022 35.433,51.816 45.72,51.816 56.388,51.816 45.847,54.229 35.179,54.356 56.515,54.356
NetC12_1: C12.1 DD1.6 SW1.1 | length 22.3
  Top Layer w0.254: DD1.6 48.336,46.985 47.339,46.985 47.181,47.142 46.683,47.142 46.395,46.854 45.254,46.854 44.902,47.207 44.902,47.706 45.656,48.46 46.338,48.46 46.741,48.862 46.954,48.862 47.306,49.214 47.306,49.83 47.515,50.039 49.538,50.039 49.589,49.988 52.889,49.988 53.601,49.276 SW1.1 55.768,48.603 56.567,48.603 58.942,46.228 C12.1
NetD5_2: D5.2 Q1.2 R1.2 | length 7.2
  Top Layer w0.4: R1.2 D5.2 43.505,30.785 44.285,30.005 44.65,30.005 45.085,29.57 Q1.2
NetDD1_1: DD1.1 R6.1 | length 9.1
  Top Layer w0.254: DD1.1 49.272,42.799 51.816,42.799 53.721,40.894 55.967,40.894 R6.1
NetDD1_2: DD1.2 Y1.3 | length 1.6
  Top Layer w0.254: DD1.2 49.68,44.334 Y1.3@49.923,44.577
NetDD1_3: DD1.3 R8.1 | length 13
  Top Layer w0.254: DD1.3 48.336,44.933 47.609,44.933 47.323,44.647 47.323,43.371 48.403,42.291 51.308,42.291 53.5,40.099 55.988,40.099 56.261,39.826 R8.1
NetJ1_Out1_1: J1_Out1.1 SB_S1_Out1.2 | length 2.1
  Bottom Layer w0.5: J1_Out1.1 64.389,54.102 SB_S1_Out1.2
NetJ1_Out1_2: J1_Out1.2 SB2_Out1.1 SB3_Out1.1
NetJ1_Out1_3: J1_Out1.3 SB_G1_Out1.2 | length 2.2
  Bottom Layer w0.5: SB_G1_Out1.2 58.674,53.591 59.055,53.972 J1_Out1.3
NetJ1_Out2_1: J1_Out2.1 SB_S1_Out2.2 | length 2.2
  Bottom Layer w0.5: J1_Out2.1 53.848,53.975 SB_S1_Out2.2
NetJ1_Out2_2: J1_Out2.2 SB2_Out2.1 SB3_Out2.1
NetJ1_Out2_3: J1_Out2.3 SB_G1_Out2.2 | length 2.2
  Bottom Layer w0.5: SB_G1_Out2.2 48.006,53.691 48.387,54.072 J1_Out2.3
NetJ1_Out3_1: J1_Out3.1 SB_S1_Out3.2 | length 2.2
  Bottom Layer w0.5: J1_Out3.1 43.561,53.975 SB_S1_Out3.2
NetJ1_Out3_2: J1_Out3.2 SB2_Out3.1 SB3_Out3.1
NetJ1_Out3_3: J1_Out3.3 SB_G1_Out3.2 | length 2.2
  Bottom Layer w0.5: SB_G1_Out3.2 37.719,53.691 38.1,54.072 J1_Out3.3
NetJ1_Out4_1: J1_Out4.1 SB_S1_Out4.2 | length 2.2
  Bottom Layer w0.5: J1_Out4.1 32.639,53.975 SB_S1_Out4.2
NetJ1_Out4_2: J1_Out4.2 SB2_Out4.1 SB3_Out4.1
NetJ1_Out4_3: J1_Out4.3 SB_G1_Out4.2 | length 2.2
  Bottom Layer w0.5: SB_G1_Out4.2 26.797,53.691 27.178,54.072 J1_Out4.3
NetLD1_2: LD1.2 R6.2 | length 1.4
  Top Layer w0.3: R6.2 LD1.2
NetLD2_2: LD2.2 R8.2 | length 1.4
  Top Layer w0.3: R8.2 LD2.2
NetQ2_1: Q2.1 Q3.2 R3.1 | length 10.5
  Top Layer w0.4: Q3.2 55.565,30.546 56.515,31.496 56.515,32.004 57.023,32.512 59.69,32.512 60.325,33.147 60.325,35.076 60.266,35.135 60.266,35.36 Q2.1 60.066,35.61 59.73,35.946 R3.1
NetQ2_3: Q2.3 Q3.1 R5.2 | length 9.8
  Top Layer w0.3: R5.2 54.852,36.195 56.515,36.195 56.896,35.814 56.896,33.528 ; Q3.1 55.765,32.696 56.064,32.696 56.896,33.528 ; Q2.3 56.928,33.56 56.896,33.528
NetQ3_3: Q3.3 Q4.1 Q4.2 R7.1 | length 11.5
  Top Layer w0.4: Q4.2 Q4.1 ; R7.1 55.526,33.844 54.977,33.295 54.948,33.295 54.163,32.51 Q4.1 ; Q3.3 57.465,31.496 57.265,31.296 57.265,30.88 55.779,29.394 Q4.1
NetQ5_1: Q5.1 R7.2 | length 1.9
  Top Layer w0.4: Q5.1 54.163,34.976 54.431,35.244 R7.2
NetQ6_Out1_3: Q6_Out1.3 R9_Out1.2 SB_S1_Out1.1 | length 6
  Bottom Layer w0.5: Q6_Out1.3 63.588,47.621 63.881,47.914 63.881,50.095 64.131,50.345 64.131,50.447 64.287,50.603 SB_S1_Out1.1
NetQ6_Out2_3: Q6_Out2.3 R9_Out2.2 SB_S1_Out2.1 | length 3.5
  Bottom Layer w0.5: Q6_Out2.3 52.639,47.702 53.848,48.911 SB_S1_Out2.1
NetQ6_Out3_3: Q6_Out3.3 R9_Out3.2 SB_S1_Out3.1 | length 3.4
  Bottom Layer w0.5: Q6_Out3.3 42.447,47.702 43.561,48.816 SB_S1_Out3.1
NetQ6_Out4_3: Q6_Out4.3 R9_Out4.2 SB_S1_Out4.1 | length 3.2
  Bottom Layer w0.5: Q6_Out4.3 32.444,47.901 32.444,49.057 32.639,49.252 SB_S1_Out4.1
NetQ7_Out1_3: Q7_Out1.3 SB_G1_Out1.1 | length 3.4
  Bottom Layer w0.5: Q7_Out1.3 57.658,47.706 58.674,48.722 SB_G1_Out1.1
NetQ7_Out2_3: Q7_Out2.3 SB_G1_Out2.1 | length 3.4
  Bottom Layer w0.5: SB_G1_Out2.1 48.108,50.603 48.768,49.943 Q7_Out2.3
NetQ7_Out3_3: Q7_Out3.3 SB_G1_Out3.1 | length 3.4
  Bottom Layer w0.5: SB_G1_Out3.1 37.821,50.603 38.481,49.943 Q7_Out3.3
NetQ7_Out4_3: Q7_Out4.3 SB_G1_Out4.1 | length 3.7
  Bottom Layer w0.5: SB_G1_Out4.1 26.808,50.603 27.055,50.356 27.055,50.345 28.426,48.975 Q7_Out4.3
NetSB1_1: SB1.1 Y1.1 | length 2
  Top Layer w0.254: SB1.1@51.784,47.625 52.064,47.346 52.064,47.045 52.485,46.623 Y1.1
RailComTX: DD1.20 R4.2 R5.1 | length 19.4
  Top Layer w0.254: DD1.20 43.692,43.684 46.355,41.021 46.355,36.957 47.117,36.195 51.574,36.195 R5.1 53.265,37.886 54.836,37.886 R4.2
S1: DD1.7 Q6_Out1.1 R10_Out1.1 | length 26.4
  Top Layer w0.254: v1(45.504,47.456) 45.584,47.456 45.711,47.584 46.483,47.584 46.495,47.596 47.369,47.596 47.381,47.584 DD1.7
  Bottom Layer w0.254: v1(45.504,47.456) 45.504,47.376 45.085,46.958 45.085,44.45 47.244,42.291 60.198,42.291 61.65,43.743 61.65,44.39 R10_Out1.1 61.71,45.651 Q6_Out1.1
S2: DD1.8 Q6_Out2.1 R10_Out2.1 | length 15
  Top Layer w0.254: v1(46.99,48.26) 47.003,48.247 48.374,48.247 DD1.8
  Bottom Layer w0.254: v1(46.99,48.26) 46.99,47.449 46.228,46.687 46.228,44.591 47.385,43.434 52.439,43.434 R10_Out2.1 53.455,45.713 Q6_Out2.1
S3: DD1.13 Q6_Out3.1 R10_Out3.1 | length 5.8
  Top Layer w0.254: DD1.13 42.558,48.247 44.056,48.247 v1(44.069,48.26)
  Bottom Layer w0.254: R10_Out3.1 43.197,45.847 43.312,45.847 43.671,46.206 43.671,47.782 44.069,48.18 v1(44.069,48.26)
S4: DD1.14 Q6_Out4.1 R10_Out4.1 | length 11.6
  Top Layer w0.254: v1(35.56,47.498) 35.603,47.541 42.502,47.541 DD1.14
  Bottom Layer w0.254: R10_Out4.1 33.12,44.659 Q6_Out4.1 ; Q6_Out4.1@33.12,45.942 33.394,46.216 34.278,46.216 v1(35.56,47.498)
SWD_CLK: DD1.19 SWD.2 | length 4.8
  Top Layer w0.254: SWD.2 40.386,42.902 41.767,44.283 42.494,44.283 DD1.19
SWD_IO: DD1.18 SWD.4 | length 8.9
  Top Layer w0.254: SWD.4 36.83,42.418 39.243,42.418 41.758,44.933 42.494,44.933 DD1.18
pads on no net: DA2.4 Q1.1 Q1.4 Q1.5 Q1.7

## Polygon pours and split planes (outlines as drawn)
GND on Bottom Layer "GND_Bot" (solid, remove dead copper, pour order 6): 25.527,55.88 65.659,55.88 65.659,25.527 25.527,25.527
+5V on Bottom Layer "+5V" (solid, remove dead copper, pour order 0): 44.45,28.829 44.831,28.448 45.212,28.448 45.72,28.956 45.72,32.512 46.99,33.782 55.88,33.782 58.166,36.068 58.166,38.227 57.404,38.989 48.514,38.989 46.482,41.021 42.164,41.021 41.91,40.767 41.91,37.973 43.307,36.576 43.307,33.401 44.323,32.385
+12V on Bottom Layer "+12V" (solid, remove dead copper, pour order 5): 36.83,35.179 36.83,28.067 37.719,27.178 40.894,27.178 41.148,27.432 43.053,29.337 43.053,30.988 42.926,31.115 42.926,35.052 42.164,35.814 37.465,35.814
GND on Top Layer "GND_Top" (solid, remove dead copper, pour order 4): 25.527,55.88 65.659,55.88 65.659,25.527 25.527,25.527

## Keep-outs
Keep-Out Layer:
  circle w0.254: c61.595,29.464 r3

## Other copper
Top Layer:
  region net +5V: 56.769,37.465 56.769,36.703 57.912,35.56 58.547,35.56 58.547,37.465
Bottom Layer:
  region net NetJ1_Out1_2: 60.833,54.356 62.357,54.356 62.992,53.721 62.992,52.07 60.452,52.07 60.452,53.848
  region net NetJ1_Out2_2: 50.165,54.356 51.689,54.356 52.324,53.721 52.324,52.07 49.784,52.07 49.784,53.848
  region net NetJ1_Out3_2: 39.878,54.356 41.402,54.356 42.037,53.721 42.037,52.07 39.497,52.07 39.497,53.848
  region net NetJ1_Out4_2: 28.956,54.356 30.48,54.356 31.115,53.721 31.115,52.07 28.575,52.07 28.575,53.848
  region net DCC2: 31.242,37.084 31.496,37.338 33.528,37.338 36.576,34.29 36.576,30.734 36.195,30.353 32.004,30.353 31.242,31.115
  region net +3V3: 51.181,41.148 51.181,40.386 51.435,40.132 53.721,40.132 54.61,41.021 54.61,41.783 54.483,41.91 51.943,41.91
  region net DCC1: 30.226,37.338 27.813,37.338 27.559,37.084 27.559,28.829 29.337,27.051 36.576,27.051 36.576,28.956 31.115,28.956 30.48,29.591 30.48,37.084

## Silkscreen, mask and mechanical layers (free items; w line width, h text height)
Bottom Overlay:
  lines w0.2: 24.638,42.799 66.04,42.799 ; 35.306,42.799 35.306,57.277 ; 45.847,42.799 45.847,57.023 ; 55.499,42.799 55.499,57.531
  text "+12V" at 49.53,53.34 h1 r90
  text "+5V" at 53.203,53.213 h1 r90
  text "+12V" at 39.243,53.086 h1 r90
  text "+12V" at 28.321,52.959 h1 r90
  text "+5V" at 42.916,52.959 h1 r90
  text "+5V" at 31.994,52.832 h1 r90
  text "+12V" at 60.071,52.832 h1 r90
  text "+5V" at 63.744,52.705 h1 r90
  text "S2" at 55.235,51.435 h1 r90
  text "S3" at 44.947,51.181 h1 r90
  text "S4" at 34.026,51.054 h1 r90
  text "G2" at 48.25,50.038 h1 r90
  text "G3" at 37.962,49.784 h1 r90
  text "S1" at 65.014,49.784 h1 r90
  text "G4" at 27.041,49.657 h1 r90
  text "G1" at 58.791,49.53 h1 r90
  text "R9" at 60.706,49.032 h1
  text "R9" at 34.29,48.905 h1
  text "R9" at 44.958,48.905 h1
  text "R9" at 55.372,48.905 h1
Board Shape:
  the board outline again, w0.5

## Dimensions
65.659,25.527 to 65.659,55.88 on Top Component Center
25.527,25.527 to 65.659,25.527 on Top Component Center

## Text inside footprints (layer, text, board x,y; h text height)
DD1: Top 3D Body "*" at 47.638,44.653 h1.27 r180; Mechanical 7 "0.03in/0.762mm" at 50.609,52.959 h0.64 r180; Mechanical 7 "0.026in/0.65mm" at 55.88,44.327 h0.64 r180; Mechanical 7 "0.26in/6.604mm" at 40.183,46.926 h0.64 r180; Mechanical 7 "0.26in/6.604mm" at 47.688,38.989 h0.64 r180; Mechanical 7 "0.176in/4.47mm" at 47.688,40.894 h0.64 r180; Mechanical 7 "Alt 2 Padstyle: OX90Y60D30P" at 54.038,62.611 h1.27 r180; Mechanical 7 "Alt 1 Padstyle: OX60Y90D30P" at 54.038,61.087 h1.27 r180; Mechanical 7 "Pin One Padstyle: RX58Y14D0T" at 54.356,56.515 h1.27 r180; Mechanical 7 "Default Padstyle: RX58Y14D0T" at 54.356,54.991 h1.27 r180